# EAGLE board Pinduino-Nano-Sys11a (EAGLE 9.0.1)
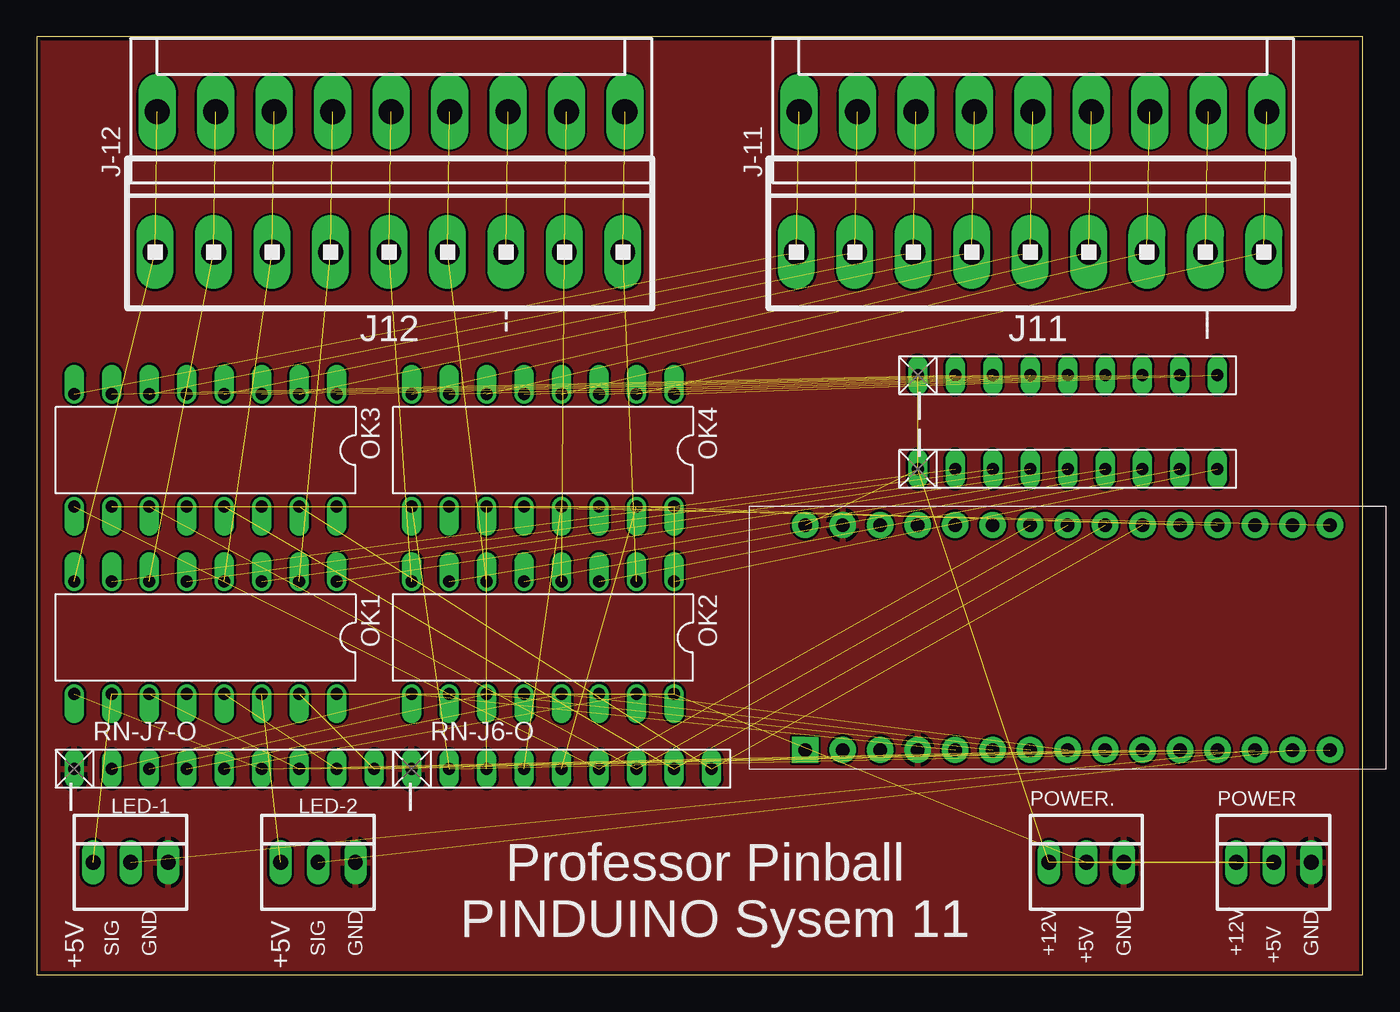
[diagram p0: board, top side]
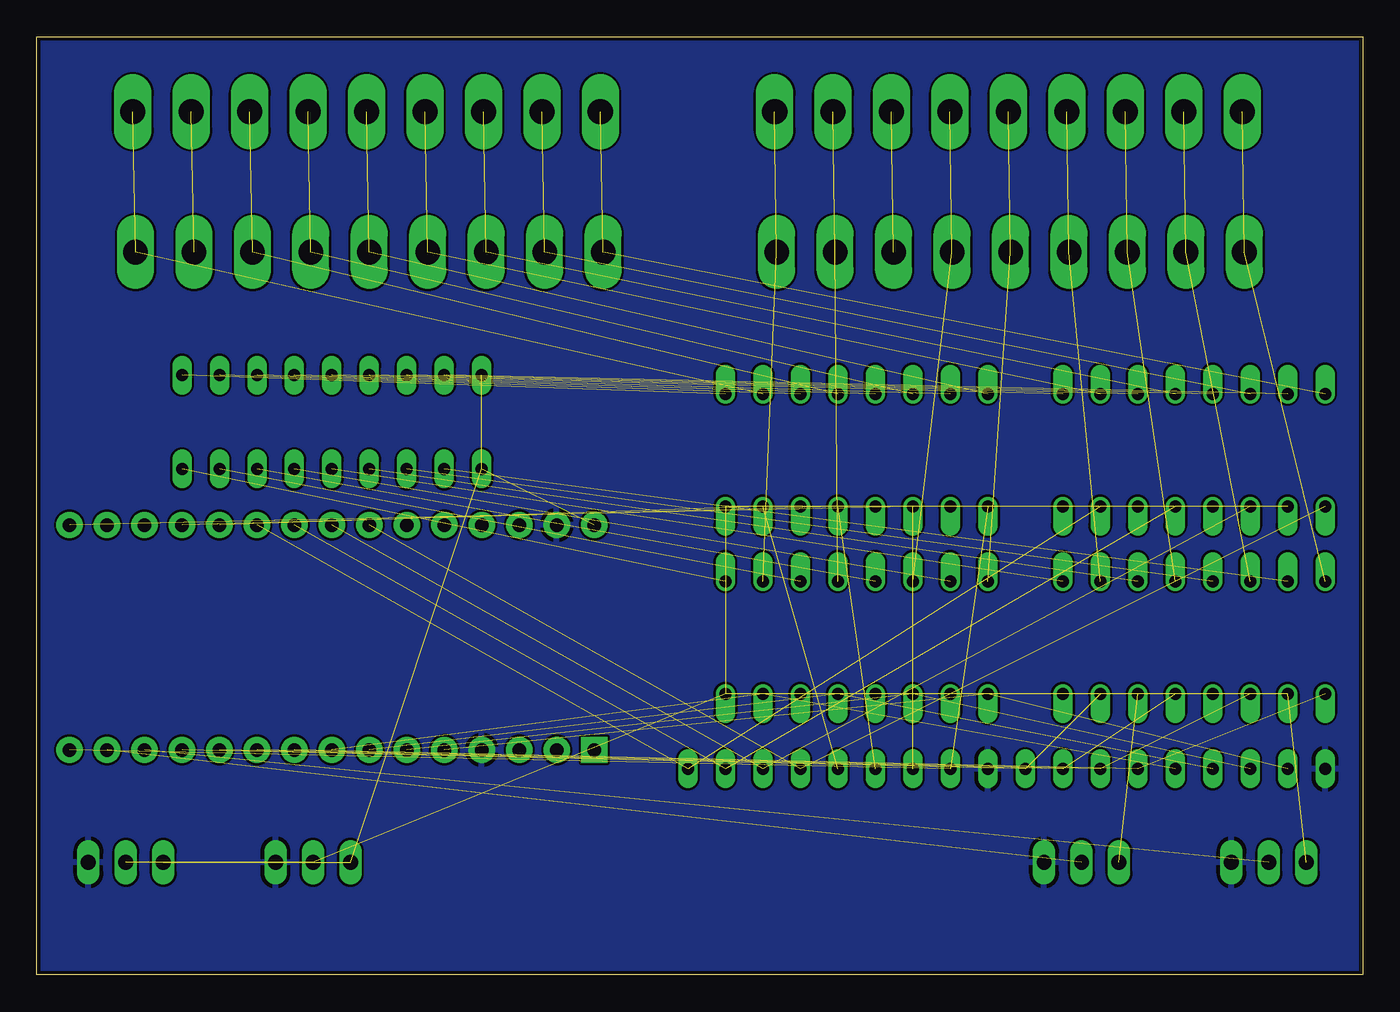
[diagram p1: board, bottom side, seen from below]

Size 89.84 x 63.57 mm. Coordinates in mm from the lower left corner, seen from the top.
Outline: 0,0 89.84,0 89.84,63.57 0,63.57 0,0
Copper layers (1*16): Top 0.035mm / dielectric 1.5mm / Bottom 0.035mm
Design rules "SeeedStudio_2layer_DRU_no_angle_20140221": minimum track width 6mil, minimum drill 12mil, track to track 6mil, track to pad 6mil, pad to pad 6mil, via to via 6mil, smd to smd 0mil, copper to edge 10mil, drill to drill 10mil, minimum pad ring 10mil, minimum via ring 6mil, stop-mask expansion 2mil, vias tented up to drill 100mil, thermal gap 10mil
Net classes: 0 default: width 0.406 mm; 1 Power: width 0.61 mm; 2 GND: width 0.61 mm

## Footprints (pad centres in the part's own frame; a part is rotated, then mirrored left to right if it is on the bottom)
1X9MTA = drill 1.676 long: 1 15.85,0; 2 11.887,0; 3 7.925,0; 4 3.962,0; 5 0,0; 6 -3.962,0; 7 -7.925,0; 8 -11.887,0; 9 -15.85,0
KK-156-9 = drill 1.7 pad 2.184 long: 1 -15.84,0; 2 -11.88,0; 3 -7.92,0; 4 -3.96,0; 5 0,0; 6 3.96,0; 7 7.92,0; 8 11.88,0; 9 15.84,0
22-23-2031 = drill 1 long: 1 -2.54,0; 2 0,0; 3 2.54,0
ARDUINO_NANO2 = drill 0.914 pad 1.778 square: J1.1 -7.62,17.78 | drill 0.914 pad 1.778: J1.2 -7.62,15.24; J1.3 -7.62,12.7; J1.4 -7.62,10.16; J1.5 -7.62,7.62; J1.6 -7.62,5.08; J1.7 -7.62,2.54; J1.8 -7.62,0; J1.9 -7.62,-2.54; J1.10 -7.62,-5.08; J1.11 -7.62,-7.62; J1.12 -7.62,-10.16; J1.13 -7.62,-12.7; J1.14 -7.62,-15.24; J1.15 -7.62,-17.78; J2.1 7.62,17.78; J2.2 7.62,15.24; J2.3 7.62,12.7; J2.4 7.62,10.16; J2.5 7.62,7.62; J2.6 7.62,5.08; J2.7 7.62,2.54; J2.8 7.62,0; J2.9 7.62,-2.54; J2.10 7.62,-5.08; J2.11 7.62,-7.62; J2.12 7.62,-10.16; J2.13 7.62,-12.7; J2.14 7.62,-15.24; J2.15 7.62,-17.78
DIL16 = drill 0.813 offset: 1 -8.89,-3.81; 2 -6.35,-3.81; 3 -3.81,-3.81; 4 -1.27,-3.81; 5 1.27,-3.81; 6 3.81,-3.81; 7 6.35,-3.81; 8 8.89,-3.81; 9 8.89,3.81; 10 6.35,3.81; 11 3.81,3.81; 12 1.27,3.81; 13 -1.27,3.81; 14 -3.81,3.81; 15 -6.35,3.81; 16 -8.89,3.81
RN-9 = drill 0.813 long: 1 -10.16,0; 2 -7.62,0; 3 -5.08,0; 4 -2.54,0; 5 0,0; 6 2.54,0; 7 5.08,0; 8 7.62,0; 9 10.16,0

## Placement (x,y rotation side)
J11  J11  [1X9MTA]  67.31,48.99 0 top
J12  J12  [1X9MTA]  23.86,48.99 0 top
J-11  J 11  [KK-156-9]  67.5,58.5 0 top
J-12  J 12  [KK-156-9]  24,58.5 0 top
LED-1  [22-23-2031]  6.35,7.62 0 top
LED-2  [22-23-2031]  19.05,7.62 0 top
MODUL1  ARDUINO_NANO2  [ARDUINO_NANO2]  69.85,22.86 90 top
OK1  TIL199  [DIL16]  11.43,22.86 180 top
OK2  TIL199  [DIL16]  34.29,22.86 180 top
OK3  TIL199  [DIL16]  11.43,35.56 180 top
OK4  TIL199  [DIL16]  34.29,35.56 180 top
POWER  [22-23-2031]  83.82,7.62 0 top
POWER.  [22-23-2031]  71.12,7.62 0 top
RN-J6-I  10k  [RN-9]  69.85,40.64 0 top
RN-J6-O  10k  [RN-9]  35.56,13.97 0 top
RN-J7-I  10k  [RN-9]  69.85,34.29 0 top
RN-J7-O  10k  [RN-9]  12.7,13.97 0 top

## Library data of the parts
J11 J12 = con-amp
J-11 J-12 = con-molex; OC_FARNELL: unknown; OC_NEWARK: unknown
LED-1 LED-2 POWER POWER. = con-molex; MF: MOLEX; MPN: 22-23-2031; OC_FARNELL: 1462950; OC_NEWARK: 30C0862
MODUL1 = arduino; ANZAHL: 2; MODUL: TRUE; STECKX0: -76200; STECKX1: 76200; STECKY0: 177800; STECKY1: 177800
OK1-OK4 = optocoupler; MPN: TIL 199; OC_FARNELL: 1683370; OC_NEWARK: 05R6483
RN-J6-I RN-J6-O RN-J7-I RN-J7-O = resistor-net; OC_FARNELL: unknown; OC_NEWARK: unknown

## Nets
3V3: MODUL1.J2.14
+5V: MODUL1.J2.4
ARD+5V [Power]: LED-1.1 LED-2.1 OK1.10 OK1.12 OK1.14 OK1.16 OK2.10 OK2.12 OK2.14 OK2.16 OK3.10 OK3.12 OK3.14 OK3.16 OK4.10 OK4.12 OK4.14 OK4.16 POWER.2 POWER..2
AREF: MODUL1.J2.13
GND: LED-1.3 LED-2.3 MODUL1.J1.4 MODUL1.J2.2 POWER.3 POWER..3 RN-J6-O.1 RN-J7-O.1
N$1: J12.6 J-12.4 OK1.2
N$2: MODUL1.J1.5 OK2.9 RN-J7-O.2
N$3: OK1.3 RN-J7-I.4
N$4: OK1.5 RN-J7-I.3
N$5: OK1.7 RN-J7-I.2
N$6: OK2.1 RN-J7-I.9
N$7: OK2.3 RN-J7-I.8
N$8: OK2.5 RN-J7-I.7
N$9: OK1.1 RN-J7-I.5
N$10: J12.9 J-12.1 OK1.8
N$11: J12.8 J-12.2 OK1.6
N$12: J12.7 J-12.3 OK1.4
N$13: OK2.7 RN-J7-I.6
N$14: J12.5 J-12.5 OK2.8
N$15: J11.9 J-11.1 OK3.8
N$16: J12.2 J-12.8 OK2.4
N$17: J12.1 J-12.9 OK2.2
N$18: MODUL1.J1.6 OK2.11 RN-J7-O.3
N$19: J11.7 J-11.3 OK3.4
N$20: J11.5 J-11.5 OK4.8
N$21: J11.4 J-11.6 OK4.6
N$22: J11.3 J-11.7 OK4.4
N$23: J12.3 J-12.7
N$24: MODUL1.J1.11 OK1.13 RN-J7-O.8
N$25: J11.2 J-11.8
N$27: J11.1 J-11.9 OK4.2
N$28: MODUL1.J1.7 OK2.13 RN-J7-O.4
N$29: OK4.1 RN-J6-I.9
N$30: OK4.3 RN-J6-I.8
N$31: OK4.5 RN-J6-I.7
N$32: OK3.3 RN-J6-I.4
N$33: OK3.1 RN-J6-I.5
N$34: OK3.5 RN-J6-I.3
N$35: OK4.7 RN-J6-I.6
N$36: MODUL1.J2.8 OK3.11 RN-J6-O.7
N$37: OK3.7 RN-J6-I.2
N$38: MODUL1.J2.7 OK3.9 RN-J6-O.6
N$39: MODUL1.J2.15 OK4.11 RN-J6-O.3
N$40: J11.8 J-11.2 OK3.6
N$42: MODUL1.J2.12 OK4.13 RN-J6-O.4
N$43: MODUL1.J2.11 OK4.15 RN-J6-O.5
N$44: LED-2.2 MODUL1.J1.14
N$45: LED-1.2 MODUL1.J1.13
N$46: MODUL1.J1.12 OK1.15 RN-J7-O.9
N$47: J12.4 J-12.6 OK2.6
N$48: J11.6 J-11.4 OK3.2
N$49: MODUL1.J1.10 OK1.11 RN-J7-O.7
N$51: MODUL1.J1.8 OK2.15 RN-J7-O.5
N$54: MODUL1.J1.9 OK1.9 RN-J7-O.6
N$55: MODUL1.J2.9 OK3.13 RN-J6-O.8
N$56: MODUL1.J2.10 OK3.15 RN-J6-O.9
N$60: MODUL1.J1.15 OK4.9 RN-J6-O.2
N$61 [GND]: MODUL1.J2.1 POWER.1 POWER..1 RN-J6-I.1 RN-J7-I.1

## Tracks (layer width: path | path; a pad name or v marks a point on that pad's centre or on a via)
ARD+5V  (19 unrouted)
GND
  pour Top: -1.27,64.77 -1.27,-2.54 92.71,-2.54 92.71,64.77
  pour Bottom: -2.54,66.04 -2.54,-1.27 91.44,-1.27 91.44,66.04
N$1  (2 unrouted)
N$2  (2 unrouted)
N$3  (1 unrouted)
N$4  (1 unrouted)
N$5  (1 unrouted)
N$6  (1 unrouted)
N$7  (1 unrouted)
N$8  (1 unrouted)
N$9  (1 unrouted)
N$10  (2 unrouted)
N$11  (2 unrouted)
N$12  (2 unrouted)
N$13  (1 unrouted)
N$14  (2 unrouted)
N$15  (2 unrouted)
N$16  (2 unrouted)
N$17  (2 unrouted)
N$18  (2 unrouted)
N$19  (2 unrouted)
N$20  (2 unrouted)
N$21  (2 unrouted)
N$22  (2 unrouted)
N$23  (1 unrouted)
N$24  (2 unrouted)
N$25  (1 unrouted)
N$27  (2 unrouted)
N$28  (2 unrouted)
N$29  (1 unrouted)
N$30  (1 unrouted)
N$31  (1 unrouted)
N$32  (1 unrouted)
N$33  (1 unrouted)
N$34  (1 unrouted)
N$35  (1 unrouted)
N$36  (2 unrouted)
N$37  (1 unrouted)
N$38  (2 unrouted)
N$39  (2 unrouted)
N$40  (2 unrouted)
N$42  (2 unrouted)
N$43  (2 unrouted)
N$44  (1 unrouted)
N$45  (1 unrouted)
N$46  (2 unrouted)
N$47  (2 unrouted)
N$48  (2 unrouted)
N$49  (2 unrouted)
N$51  (2 unrouted)
N$54  (2 unrouted)
N$55  (2 unrouted)
N$56  (2 unrouted)
N$60  (2 unrouted)
N$61  (4 unrouted)

## Text on the board
tNames: -- | -- | -- | -- | -- | -- | -- | -- | -- | -- | -- | Professor Pinball | PINDUINO Sysem 11 | +5V | +5V | +5V | +5V | SIG | GND | SIG | GND | +12V | GND | +12V | GND